# Altium PCB SENSEI_Base-Board_Clean.PcbDoc (part 3 of 7)
Units mm, origin at the board's own origin, x right, y up, seen from the top; angles counter-clockwise.
Board outline 25.2 x 15.15 mm, 8 copper layers (Top Sig/Pwr, GND1, Sig1, GND2, Sig2, Pwr, GND3, Bot Sig/Pwr), stack 1.53 mm thick; 187 components, 192 nets, 951 pads, 1831 vias.
Unrouted connection lines stored in the file: 214.
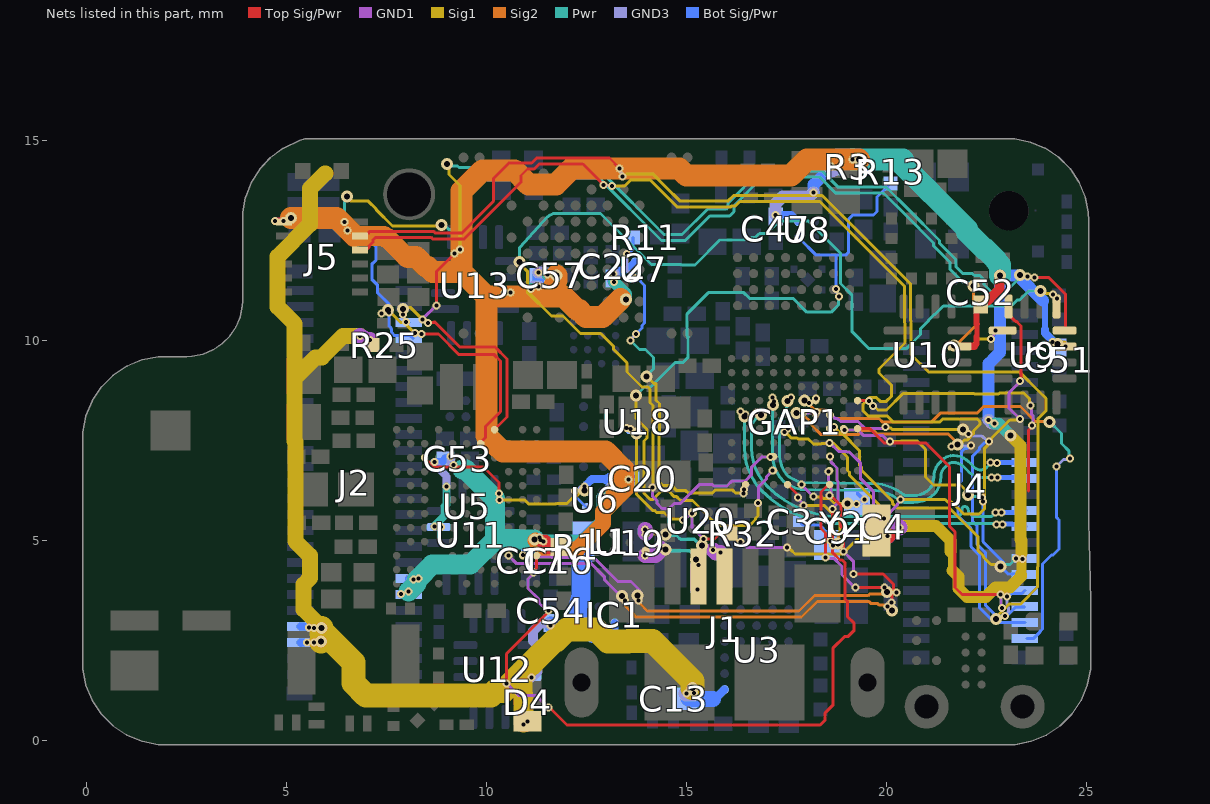
[diagram p8: the nets of this part, all layers, seen from the top]

## Via types
v1: diameter 0.2, hole 0.1, Top Sig/Pwr to GND1, 467 vias
v2: diameter 0.2, hole 0.1, GND3 to Bot Sig/Pwr, 431 vias
v3: diameter 0.2, hole 0.1, GND1 to Sig1, 369 vias
v4: diameter 0.3, hole 0.15, Sig1 to Pwr, 279 vias
v5: diameter 0.2, hole 0.1, Pwr to GND3, 270 vias
v6: diameter 0.3, hole 0.15, Top Sig/Pwr to Bot Sig/Pwr, tented both sides, 15 vias

## Nets (pads, with @x,y where several pads share a name; then routed paths per layer and width w, separated by ;. In a path a pad name is that pad's centre, name@x,y a point inside that pad or via, vN(x,y) a via of type N, cw(c..) or ccw(c..) an arc to the next point about the centre after c; other vN are vias at no path point) (continued)
GAP_GPIO48: (continued)
  Bot Sig/Pwr w0.075: v2(22.115,7.377) 22.082,7.377 22.002,7.297 21.948,7.297 21.869,7.219 21.869,6.489 21.788,6.407 21.788,5.629 22.11,5.307 22.11,4.847 22.322,4.635 22.322,3.32 22.692,2.95 J4.37@23.455,2.95
GAP_GPIO49: GAP1.G7 J4.39 | length 13.4
  GND1 w0.075: v3(18.056,8.444) 18.08,8.468 18.12,8.468 18.206,8.555 v1(18.24,8.555)
  Sig2 w0.075: v4(17.948,8.508) 17.955,8.508 18.164,8.299 18.203,8.26 18.491,8.26 18.701,8.05 19.812,8.05 19.903,7.958 21.115,7.958 21.342,8.185 22.262,8.185 22.427,8.35 23.347,8.35 23.724,7.973 24.072,7.973 v4(24.077,7.967)
  GND3 w0.075: v2(24.244,6.853) 24.42,7.029 24.564,7.029 v5(24.588,7.053)
  Sig1 w0.075: v4(17.948,8.508) 17.992,8.508 v3(18.056,8.444)
  Pwr w0.075: v4(24.077,7.967) 24.37,7.675 24.37,7.424 24.564,7.23 24.564,7.077 v5(24.588,7.053)
  Bot Sig/Pwr w0.075: J4.39@23.508,2.548 23.668,2.548 23.828,2.708 23.828,2.719 23.898,2.788 23.898,4.312 23.897,4.413 24.121,4.637 24.157,4.637 24.311,4.791 24.311,5.513 24.251,5.573 24.251,6.181 24.244,6.187 v2(24.244,6.853)
GAP_GPIO50: GAP1.K5 J4.33 J5.4 | length 37.1
  Top Sig/Pwr w0.075: J5.4@6.718,12.635 6.986,12.635 7.036,12.684 7.038,12.684 7.084,12.73 8.677,12.73 8.722,12.684 9.374,12.684 10.175,13.485 10.175,14.061 10.552,14.438 11.128,14.438 11.253,14.563 13.069,14.563 v1(13.328,14.304) ; GAP1.K5@19.275,7.8 19.577,7.8 19.933,7.445 20.972,7.445 21.572,6.845 21.572,5.36 21.712,5.219 21.712,3.828 21.891,3.65 22.84,3.65 v1(22.841,3.651)
  GND1 w0.075: v1(13.328,14.304) 13.352,14.28 13.352,14.209 13.369,14.191 13.369,14.124 v3(13.393,14.1) ; v1(22.841,3.651) 22.861,3.631 22.861,3.342 v3(22.883,3.32)
  GND3 w0.075: v5(22.96,3.12) 22.96,3.138 23.049,3.226 23.049,3.343 23.011,3.381 v2(23.011,3.597)
  Sig1 w0.075: v3(13.393,14.1) 13.427,14.1 13.485,14.158 13.51,14.158 13.514,14.162 14.155,14.162 14.662,13.655 14.669,13.655 14.839,13.485 16.032,13.485 16.176,13.629 18.391,13.629 20.598,11.422 20.598,10.508 20.613,10.493 20.613,9.655 21.058,9.209 23.33,9.209 23.813,8.726 23.983,8.556 23.983,8.244 23.786,8.047 23.786,4.847 23.788,4.846 23.788,4.348 23.775,4.336 23.775,3.838 23.35,3.413 23.065,3.413 22.959,3.307 v3@22.927,3.276 ; v4(22.741,3.045) 22.741,3.089 v3@22.927,3.276 ; v3(22.883,3.32) v3@22.927,3.276
  Pwr w0.075: v4(22.741,3.045) 22.802,3.045 22.853,3.096 22.936,3.096 v5(22.96,3.12)
  Bot Sig/Pwr w0.075: v2(23.011,3.597) 23.042,3.597 23.117,3.672 23.377,3.672 J4.33@23.455,3.75
GAP_GPIO51: GAP1.H6 J4.35 | length 9.9
  GND1 w0.075: v1(18.584,8.146) 18.618,8.146 18.716,8.047 18.775,8.047 18.846,7.976 19.286,7.976 19.463,7.799 19.893,7.799 19.934,7.839 v3(19.967,7.839)
  GND3 w0.075: v5(22.047,7.667) 22.081,7.667 22.139,7.609 22.39,7.609 22.521,7.479 v2(22.555,7.479)
  Sig1 w0.075: v3(19.967,7.839) 19.991,7.815 20.105,7.815 20.148,7.773 v4(21.909,7.773)
  Pwr w0.075: v4(21.909,7.773) 21.926,7.773 22.031,7.667 v5(22.047,7.667)
  Bot Sig/Pwr w0.075: v2(22.555,7.479) 22.531,7.455 22.454,7.455 22.328,7.329 22.328,7.289 22.141,7.102 22.141,5.492 22.26,5.373 22.26,4.909 22.472,4.697 22.472,3.382 22.739,3.116 23.006,3.116 23.235,3.345 J4.35@23.441,3.345
GAP_MEM_pwr_sel: GAP1.B1 R11.2 U7.B2 | length 9.7
  Top Sig/Pwr w0.075: v1(16.44,6.282) 16.458,6.299 16.458,6.382 GAP1.B1@16.475,6.4
  GND1 w0.075: v3(16.42,6.176) 16.44,6.196 v1(16.44,6.282)
  GND3 w0.075: v2(13.506,12.162) 13.506,11.763 v2(13.71,11.56) ; v5(13.6,10) 13.6,10.015 13.73,10.145 v2(13.73,10.161)
  Sig1 w0.075: v4(13.992,9.101) 14.008,9.101 14.186,8.924 14.232,8.924 14.232,8.517 14.322,8.427 14.322,7.664 14.31,7.652 14.31,6.469 14.404,6.375 14.626,6.375 14.753,6.248 14.98,6.248 15.044,6.184 15.636,6.184 15.711,6.26 16.156,6.26 16.224,6.191 16.404,6.191 v3(16.42,6.176)
  Pwr w0.075: v5(13.6,10) 13.824,9.776 13.97,9.776 14.17,9.575 14.17,9.295 13.992,9.117 v4(13.992,9.101)
  Bot Sig/Pwr w0.075: v2(13.506,12.162) 13.538,12.162 13.663,12.287 R11.2@13.663,12.575 ; U7.B2@13.7,11.55 13.778,11.55 13.95,11.378 13.95,10.444 13.883,10.377 13.883,10.314 v2(13.73,10.161)
GAP_MIC_pwr_sel: GAP1.D2 R13.2 U8.B2 | length 19.7
  GND1 w0.075: v3(16.784,5.933) 16.803,5.951 16.803,6.35 16.998,6.545 16.998,6.598 17.142,6.743 v1(17.142,6.754)
  GND3 w0.075: v2(18.735,11.288) 18.759,11.264 18.759,11.181 18.804,11.135 v5(18.804,11.102)
  Sig1 w0.075: v4(13.731,8.625) 13.732,8.624 13.732,8.057 14.009,7.78 14.009,7.563 13.934,7.488 13.934,6.182 14.092,6.025 14.154,6.025 14.354,6.225 14.564,6.225 14.691,6.098 14.752,6.098 14.85,6 15.146,6 15.773,5.374 16.569,5.374 16.723,5.528 16.723,5.555 16.784,5.617 v3(16.784,5.933)
  Pwr w0.075: v4(13.731,8.625) 13.945,8.839 14.101,8.839 14.714,9.452 14.875,9.452 14.881,9.458 14.918,9.458 15.029,9.569 15.029,10.101 15.005,10.125 15.005,10.658 15.543,11.197 16.431,11.197 16.578,11.05 17.667,11.05 18.007,10.711 18.614,10.711 18.793,10.889 18.793,11.09 v5(18.804,11.102)
  Bot Sig/Pwr w0.075: U8.B2@17.8,12.575 18.24,12.135 18.736,12.135 ; U8.B2@17.801,12.576 U8.B2@17.801,12.593 ; v2(18.735,11.288) 18.736,11.289 18.736,12.135 ; R13.2@20.136,13.924 20.099,13.924 19.763,13.588 19.763,13.228 19.672,13.138 19.153,13.138 19.044,13.028 19.044,12.201 18.978,12.135 18.736,12.135